# EAGLE board pertamina_sticker2 (EAGLE 7.6.0)
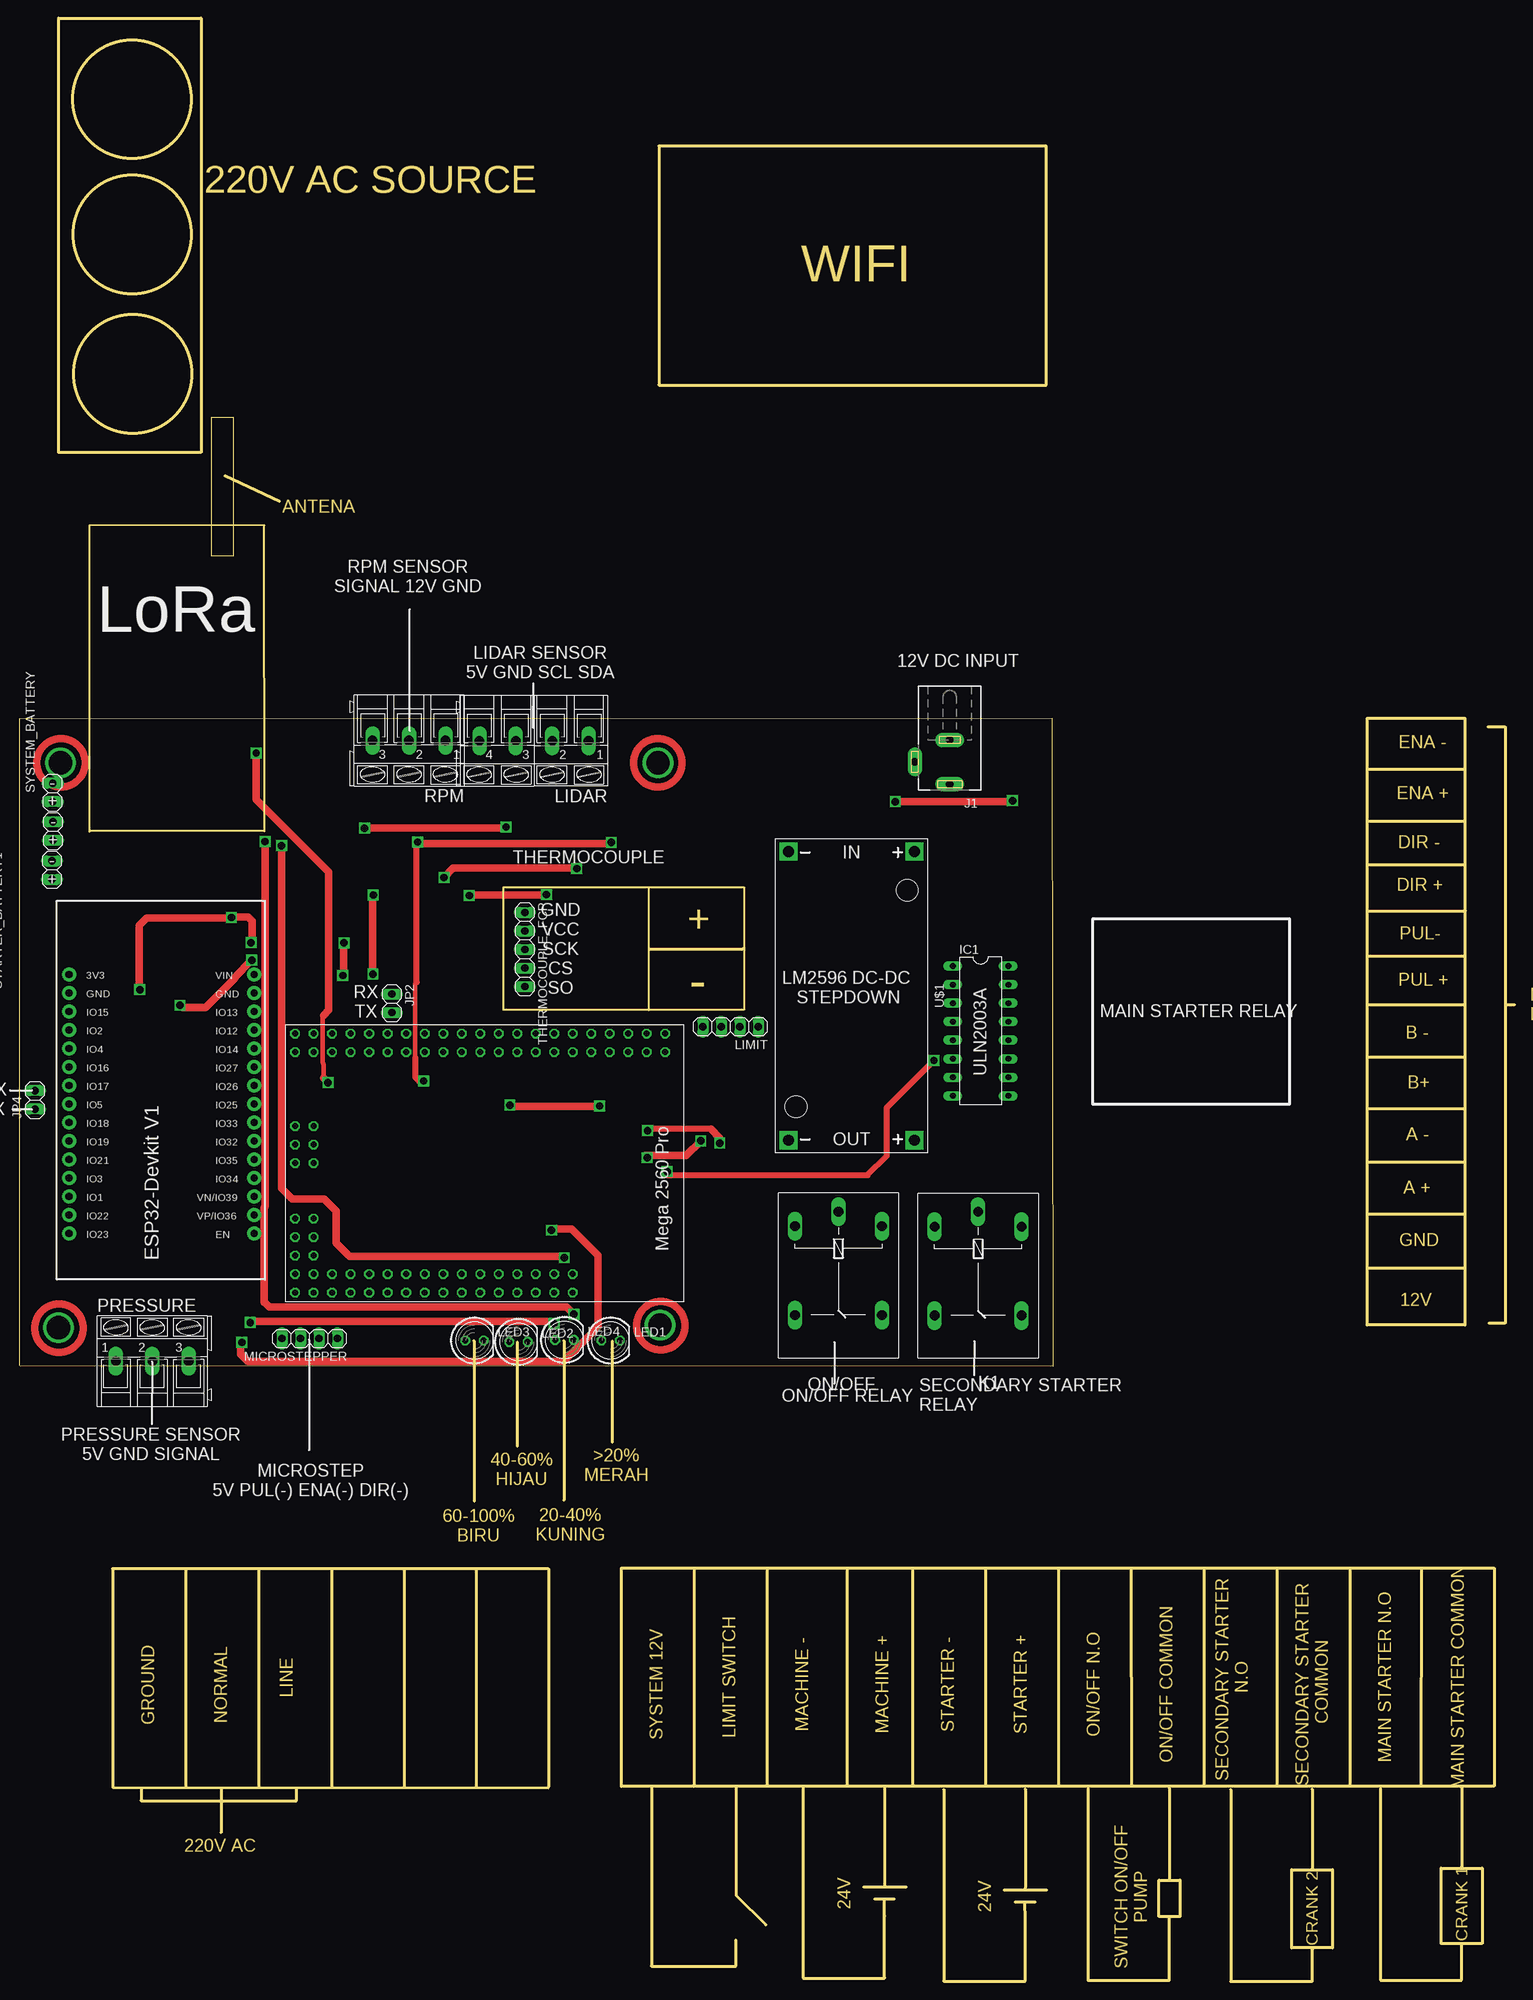
[diagram p0: board, top side]
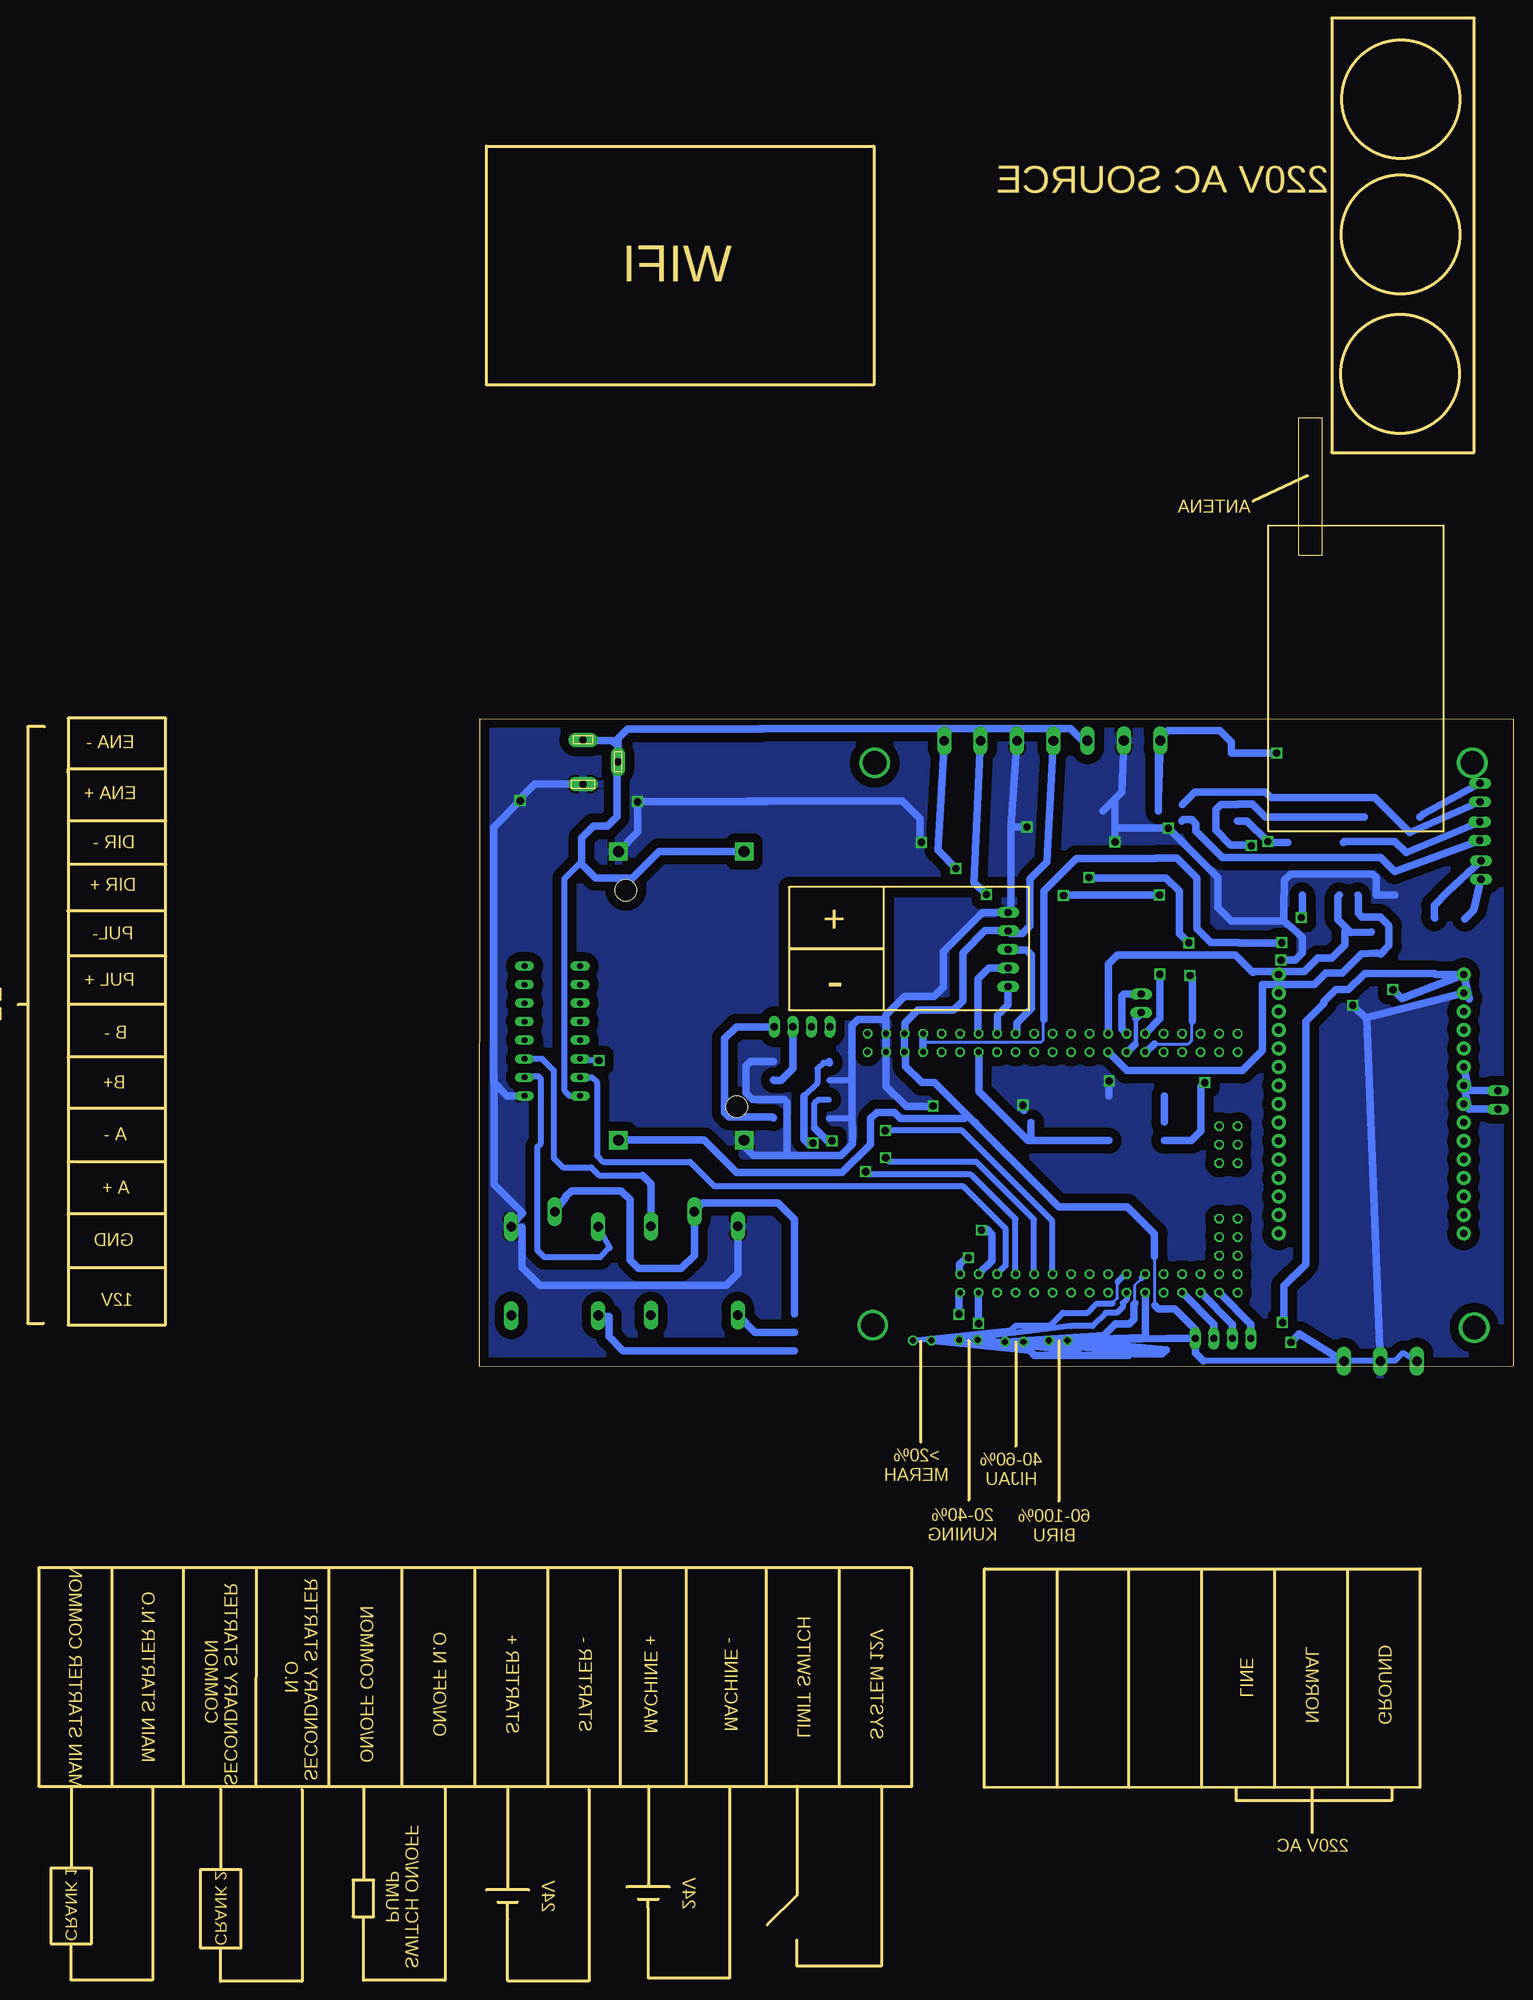
[diagram p1: board, bottom side, seen from below]

Size 205.23 x 269.44 mm. Coordinates in mm from the lower left corner, seen from the top.
Outline: 141.89,84.38 141.8,173.34 0,173.25 0,84.56
Outline: 86.39,133.3 86.39,150.18 99.43,150.18 99.43,133.33 86.37,133.33
Outline: 9.58,157.84 33.63,157.84 33.61,199.83 9.59,199.82 9.59,157.75
Outline: 9.6,183.58 9.6,172.64
Outline: 141.89,84.37 0.06,84.49
Outline: 82.59,56.72 202.42,56.72 202.42,26.78 82.58,26.76
Outline: 192.41,56.66 192.39,26.76
Outline: 182.59,56.65 182.59,26.84
Outline: 172.59,56.65 172.61,26.81
Outline: 162.59,56.65 162.59,26.84
Outline: 152.59,56.65 152.59,26.82
Outline: 142.59,56.65 142.58,26.87
Outline: 132.59,56.65 132.59,26.78
Outline: 122.59,56.65 122.58,26.78
Outline: 113.59,56.65 113.59,26.81
Outline: 102.59,56.65 102.6,26.8
Outline: 92.59,56.65 92.59,26.76
Outline: 82.59,56.65 82.6,26.73
Outline: 81.35,87.88 81.36,73.99
Outline: 74.73,87.91 74.73,66.04
Outline: 68.31,87.71 68.31,73.46
Outline: 62.38,87.9 62.41,65.9
Outline: 86.49,141.72 99.27,141.72
Outline: 72.65,56.55 72.65,26.71
Outline: 62.67,56.55 62.67,26.69
Outline: 52.82,56.53 52.82,26.57
Outline: 42.82,56.54 42.82,26.57
Outline: 32.82,56.54 32.82,26.62
Outline: 22.82,56.55 22.82,26.64
Outline: 12.82,56.57 12.82,26.57
Outline: 72.54,56.61 12.76,56.63
Outline: 12.81,26.61 72.6,26.58
Outline: 28.23,206.63 35.71,203.14
Outline: 86.74,26.81 86.74,2.08 98.35,2.08 98.35,5.67
Outline: 98.36,26.78 98.36,11.78 102.44,7.74
Outline: 107.57,26.74 107.57,0.42 118.74,0.42
Outline: 118.74,26.8 118.74,13.21
Outline: 118.74,0.49 118.74,8.97
Outline: 115.88,12.96 121.72,12.96
Outline: 120.1,11.27 117.38,11.27
Outline: 118.74,8.95 118.74,11.16
Outline: 126.87,26.33 126.87,0.02 138.05,0.02
Outline: 138.05,26.4 138.05,12.81
Outline: 138.05,0.09 138.05,8.57
Outline: 135.15,12.55 140.98,12.55
Outline: 139.41,10.87 136.69,10.87
Outline: 138.05,8.56 138.05,10.77
Outline: 146.66,26.45 146.66,0.14 157.84,0.14
Outline: 157.84,26.52 157.84,13.96
Outline: 157.84,0.21 157.84,8.69
Outline: 159.28,13.87 159.28,8.86 156.42,8.86 156.42,13.87 159.28,13.87
Outline: 166.28,26.31 166.28,0 177.45,0
Outline: 177.45,26.38 177.45,15.5
Outline: 177.45,0.07 177.46,4.39
Outline: 186.8,26.49 186.8,0.17 197.97,0.17
Outline: 180.22,15.31 180.24,4.57 174.63,4.57 174.62,15.33 180.22,15.32
Outline: 197.97,26.61 197.97,15.73
Outline: 197.97,0.3 197.97,4.91
Outline: 200.76,15.52 200.76,5.17 195.15,5.17 195.15,15.53 200.76,15.53
Outline: 16.7,26.48 16.7,24.79 38.04,24.79 38.04,26.52
Outline: 27.66,26.49 27.66,20.41
Outline: 87.78,251.89 87.78,219.09 140.94,219.09 140.94,251.9 87.78,251.89
Outline: 5.34,269.44 24.93,269.44 24.93,209.84 5.37,209.84 5.37,269.25
Outline: 184.98,173.37 198.39,173.37 198.39,90.09 184.98,90.09 184.98,173.37
Outline: 185.03,166.41 198.4,166.41 198.4,165.78
Outline: 184.98,159.26 198.35,159.26
Outline: 184.98,153.29 198.35,153.29
Outline: 185.1,146.91 198.47,146.91
Outline: 184.98,140.71 198.35,140.71
Outline: 184.99,134.05 198.36,134.05
Outline: 185.08,126.85 198.41,126.85
Outline: 185.07,119.82 198.35,119.8
Outline: 185.01,112.42 198.38,112.42
Outline: 185.01,105.3 198.37,105.3
Outline: 184.99,97.89 198.36,97.89
Outline: 201.6,172.19 203.94,172.19 203.94,90.31 201.74,90.31
Outline: 204,134.07 205.23,134.07
Outline: 99.43,150.19 99.43,133.34 66.44,133.34 66.44,150.19 99.43,150.19
Outline: 118.74,13.08 118.74,13.02 118.74,13 118.75,13.07 118.74,13.08
Outline: 138.04,12.68 138.04,12.61 138.05,12.6 138.06,12.67 138.04,12.68
Outline: circle at 15.44,258.31 radius 8.11
Outline: circle at 15.48,239.75 radius 8.11
Outline: circle at 15.56,220.62 radius 8.11
Copper layers (1*16): Top 0.035mm / dielectric 1.5mm / Bottom 0.035mm
Design rules "default": minimum track width 10mil, minimum drill 24mil, track to track 8mil, track to pad 8mil, pad to pad 8mil, via to via 8mil, smd to smd 8mil, copper to edge 40mil, drill to drill 8mil, minimum pad ring 10mil, minimum via ring 8mil, stop-mask expansion 4mil, vias tented up to drill 0mil, thermal gap 10mil

## Footprints (pad centres in the part's own frame; a part is rotated, then mirrored left to right if it is on the bottom)
DIL16 = drill 0.813 long: 1 -8.89,-3.81; 2 -6.35,-3.81; 3 -3.81,-3.81; 4 -1.27,-3.81; 5 1.27,-3.81; 6 3.81,-3.81; 7 6.35,-3.81; 8 8.89,-3.81; 9 8.89,3.81; 10 6.35,3.81; 11 3.81,3.81; 12 1.27,3.81; 13 -1.27,3.81; 14 -3.81,3.81; 15 -6.35,3.81; 16 -8.89,3.81
DCJ0202 = drill 1 pad 2 long: 1 0,3.1; 2 4.8,0; 3 0,-3
1X02 = drill 1.016 long: 1 -1.27,0; 2 1.27,0
G5LE = drill 1.321 long: 1 -7.493,-5.969; 2 -7.493,5.969; O 4.699,5.969; P -9.525,0; S 4.699,-5.969
LED5MM = drill 0.813 octagon: A -1.27,0; K 1.27,0
AK300/4 = drill 1.321 long: 1 -7.493,0; 2 -2.515,0; 3 2.515,0; 4 7.493,0
1X04 = drill 1.016 long: 1 -3.81,0; 2 -1.27,0; 3 1.27,0; 4 3.81,0
AK300/3 = drill 1.321 long: 1 -5.004,0; 2 0,0; 3 5.004,0
1X05 = drill 1.016 long: 1 -5.08,0; 2 -2.54,0; 3 0,0; 4 2.54,0; 5 5.08,0
DC-DC-STEP-DOWN-LM2596 = drill 1.5 pad 2.5 square: IN+ -19.812,8.636; IN- -19.812,-8.636; OUT+ 19.812,8.636; OUT- 19.812,-8.636 | hole 3: -14.478,7.62; 15.24,-7.62
ESP32-DEVKITV1 = drill 1 pad 1.93: 3V3 -16.52,-12.27; D1 13.96,-12.27; D2 -8.9,-12.27; D3 11.42,-12.27; D4 -6.36,-12.27; D5 1.26,-12.27; D12 -8.9,13.135; D13 -11.44,13.135; D14 -6.36,13.135; D15 -11.44,-12.27; D16 -3.82,-12.27; D17 -1.28,-12.27; D18 3.8,-12.27; D19 6.34,-12.27; D21 8.88,-12.27; D22 16.5,-12.27; D23 19.04,-12.27; D25 1.26,13.135; D26 -1.28,13.135; D27 -3.82,13.135; D32 6.34,13.135; D33 3.8,13.135; D34 11.42,13.135; D35 8.88,13.135; D36 16.5,13.135; D39 13.96,13.135; EN 19.04,13.135; GND@1 -13.98,13.135; GND@2 -13.98,-12.27; VIN -16.52,13.135
MEGAPROMINI = drill 0.8 octagon: P$1 3.81,-2.54; P$2 1.27,-2.54; P$3 3.81,-5.08; P$4 1.27,-5.08; P$5 3.81,-7.62; P$6 1.27,-7.62; P$7 3.81,-10.16; P$8 1.27,-10.16; P$9 3.81,-12.7; P$10 1.27,-12.7; P$11 3.81,-15.24; P$12 1.27,-15.24; P$13 3.81,-17.78; P$14 1.27,-17.78; P$15 3.81,-20.32; P$16 1.27,-20.32; P$17 3.81,-22.86; P$18 1.27,-22.86; P$19 3.81,-25.4; P$20 1.27,-25.4; P$21 3.81,-27.94; P$22 1.27,-27.94; P$23 3.81,-30.48; P$24 1.27,-30.48; P$25 3.81,-33.02; P$26 1.27,-33.02; P$27 3.81,-35.56; P$28 1.27,-35.56; P$29 3.81,-38.1; P$30 1.27,-38.1; P$31 3.81,-40.64; P$32 1.27,-40.64; P$33 3.81,-43.18; P$34 1.27,-43.18; P$35 3.81,-45.72; P$36 1.27,-45.72; P$37 3.81,-48.26; P$38 1.27,-48.26; P$39 3.81,-50.8; P$40 1.27,-50.8; P$41 3.81,-53.34; P$42 1.27,-53.34; P$43 36.83,-15.24; P$44 34.29,-15.24; P$45 36.83,-17.78; P$46 34.29,-17.78; P$47 36.83,-20.32; P$48 34.29,-20.32; P$49 36.83,-22.86; P$50 34.29,-22.86; P$51 36.83,-25.4; P$52 34.29,-25.4; P$53 36.83,-27.94; P$54 34.29,-27.94; P$55 36.83,-30.48; P$56 34.29,-30.48; P$57 36.83,-33.02; P$58 34.29,-33.02; P$59 36.83,-35.56; P$60 34.29,-35.56; P$61 36.83,-38.1; P$62 34.29,-38.1; P$63 36.83,-40.64; P$64 34.29,-40.64; P$65 36.83,-43.18; P$66 34.29,-43.18; P$67 36.83,-45.72; P$68 34.29,-45.72; P$69 36.83,-48.26; P$70 34.29,-48.26; P$71 36.83,-50.8; P$72 34.29,-50.8; P$73 36.83,-53.34; P$74 34.29,-53.34; P$75 31.75,-53.34; P$76 31.75,-50.8; P$77 29.21,-53.34; P$78 29.21,-50.8; P$79 26.67,-53.34; P$80 26.67,-50.8; P$81 19.05,-53.34; P$82 19.05,-50.8; P$83 16.51,-53.34; P$84 16.51,-50.8; P$85 13.97,-53.34; P$86 13.97,-50.8

## Placement (x,y rotation side)
IC1  ULN2003AN  [DIL16]  131.92,130.43 270 top
J1  DCJ0202  [DCJ0202]  127.69,167.39 180 top
JP2  [1X02]  51.1,134.23 270 top
JP4  [1X02]  2.12,120.98 90 top
K1  G5L  [G5LE]  131.59,96.08 270 top
LED1  [LED5MM]  81.16,87.94 0 top
LED2  [LED5MM]  68.49,87.76 0 top
LED3  [LED5MM]  62.45,87.94 0 top
LED4  [LED5MM]  74.8,88.03 0 top
LIDAR  [AK300/4]  70.62,170.27 180 top
LIMIT  [1X04]  97.61,131.01 180 top
MACHINE_BATTERY_12V  [1X02]  4.61,157.85 90 top
MICROSTEPPER  [1X04]  39.84,88.23 180 top
ON/OFF  G5L  [G5LE]  112.42,96.13 270 top
PRESSURE  [AK300/3]  18.23,85.09 0 top
RPM  [AK300/3]  53.46,170.29 180 top
STARTER_BATTERY1  [1X02]  4.45,152.51 270 top
SYSTEM_BATTERY  [1X02]  4.56,163.17 90 top
THERMOCOUPLE_FCP  [1X05]  69.37,141.61 270 top
U$1  DC-DC-STEP-DOWN-LM2596  [DC-DC-STEP-DOWN-LM2596]  114.21,135.26 270 top
U$2  [ESP32-DEVKITV1]  19.08,121.67 270 top
U$3  [MEGAPROMINI]  91.18,131.35 270 top

## Library data of the parts
IC1 = uln-udn
J1 = con-jack; OC_FARNELL: unknown; OC_NEWARK: unknown
JP2 JP4 LIMIT MACHINE_BATTERY_12V MICROSTEPPER STARTER_BATTERY1 SYSTEM_BATTERY THERMOCOUPLE_FCP = pinhead
K1 ON/OFF = relay; OC_FARNELL: unknown; OC_NEWARK: unknown
LED1-LED4 = led
LIDAR PRESSURE RPM = con-ptr500; OC_FARNELL: unknown; OC_NEWARK: unknown
U$1 = diy-modules
U$2 = ESP32-DEVKITV1
U$3 = MEGAPROMINI

## Nets
3.3V: U$2.3V3 U$3.P$7 U$3.P$8
5V: U$3.P$44
5V1: U$3.P$45
5V_ARDU: LED1.A LED2.A LED3.A LED4.A LIDAR.4 MICROSTEPPER.1 PRESSURE.1 THERMOCOUPLE_FCP.2 U$1.OUT+ U$3.P$5 U$3.P$6
GND: IC1.9 J1.1 K1.2 LIDAR.3 ON/OFF.1 PRESSURE.2 RPM.2 THERMOCOUPLE_FCP.1 U$1.IN+ U$1.OUT- U$2.GND@2 U$3.P$3 U$3.P$4
N$1: JP2.1 U$3.P$30
N$2: JP2.2 U$3.P$29
N$3: U$3.P$43
N$4: IC1.10 K1.1
N$5: THERMOCOUPLE_FCP.5 U$3.P$16
N$6: THERMOCOUPLE_FCP.4 U$3.P$14
N$8: THERMOCOUPLE_FCP.3 U$3.P$18
N$9: U$3.P$28
N$10: SYSTEM_BATTERY.2
N$12: U$3.P$27
N$13: MACHINE_BATTERY_12V.2
N$14: IC1.8 J1.2 J1.3 RPM.1 U$1.IN-
N$16: U$3.P$13
N$17: RPM.3
N$18: JP4.1 U$2.D17
N$19: JP4.2 U$2.D16
N$21: IC1.7 U$3.P$48
N$29: STARTER_BATTERY1.2
N$30: STARTER_BATTERY1.1
N$31: MACHINE_BATTERY_12V.1
N$32: SYSTEM_BATTERY.1
N$33: IC1.6 U$3.P$50
N$34: MICROSTEPPER.4 U$3.P$71
N$37: MICROSTEPPER.2 U$3.P$67
N$38: MICROSTEPPER.3 U$3.P$69
N$41: PRESSURE.3 U$3.P$46
N$42: U$3.P$52
N$43: U$3.P$54
N$44: IC1.11 ON/OFF.2
N$45: LED2.K U$3.P$64
N$46: LED3.K U$3.P$63
N$47: LED1.K U$3.P$62
N$48: LED4.K U$3.P$61
N$49: LIMIT.1
N$50: LIMIT.2
N$53: K1.P ON/OFF.P
N$54: ON/OFF.S
N$55: K1.S
SCL: LIDAR.2 U$3.P$32
SDA: LIDAR.1 U$3.P$31

## Tracks (layer width: path | path; a pad name or v marks a point on that pad's centre or on a via)
3.3V  (via drill 1)
  Top 1.016: v31.79,142.55 31.9,142.55 31.95,142.49 31.95,145.52 31.41,146.06 29.15,146.06 v29.09,146 29.01,145.91 17.46,145.91 16.42,144.87 16.42,136.16 16.47,136.1 v16.53,136.1
  Bottom 0.406: U$3.P$8 81.02,128.63 80.81,128.43 80.81,128.48 81.02,128.68 81.02,128.95 64.77,128.95 64.53,129.19 64.53,131.47 64.4,131.6 64.4,131.97 64.44,132.01
  Bottom 1.016: U$3.P$7 U$3.P$8 | 64.44,132.01 64.44,149.63 59.96,154.11 49.12,154.11 49.07,154.16 46.18,154.16 43.44,151.43 43.44,144.49 41.5,142.55 37.83,142.55 37.78,142.49 31.84,142.49 v31.79,142.55 | 29.09,146.06 v29.09,146 28.98,146.12 28.98,149.06 | 6.04,134.84 U$2.3V3 15.34,134.92 v16.53,136.1
5V  (via drill 1)
  Top 1.016: v35.97,155.86 35.97,108.85 37.42,107.4 41.8,107.4 43.5,105.71 43.5,101.31 45.29,99.52 74.59,99.52 v74.79,99.32
  Bottom 1.016: v35.97,155.86 36.05,155.94 38.82,155.94 40.86,157.99 40.86,160.8 40.12,161.54 37.79,161.54 37.78,161.55 35.81,161.55 34.04,159.78 20.44,159.78 | v74.79,99.32 74.79,99.42 74.69,99.52 74.88,99.52 76,98.39 76,97.13 U$3.P$44
5V1  (via drill 1)
  Top 1.016: 73.58,90.28 v73.39,90.28 73.12,90.55 31.68,90.55 | v31.68,90.41 31.68,90.55 | 31.68,90.55 31.55,90.68
  Bottom 1.016: 6.67,138.18 10.66,138.18 10.79,138.31 20.41,138.31 22.62,136.1 24.39,136.1 26.01,134.49 26.01,134.22 28.51,131.71 28.51,98.42 31.48,95.45 31.48,90.62 v31.68,90.41 | U$3.P$45 v73.4,90.28 v73.39,90.28
5V_ARDU
  Bottom 0.406: 49.18,92.62 49.18,92.74 49.18,99.39 49.27,99.48
  Bottom 0.813: PRESSURE.1 15.14,86.21 16.21,85.15 42.54,85.15
  Bottom 1.016: U$3.P$6 U$3.P$5 83.41,127.4 83.41,125.57 81.19,123.35 79.43,123.35 74.95,118.86 | 83.51,130.13 U$3.P$6 | U$3.P$6 83.51,130.13 83.51,131.52 81.72,133.31 76.84,133.31 75.58,134.57 75.58,141.15 72.51,144.21 69.43,144.21 THERMOCOUPLE_FCP.2 69.01,143.8 67.39,143.8 66.36,144.83 66.36,151.27 64.01,153.62 LIDAR.4 | 49.27,99.48 49.27,102.58 53,106.31 62.39,106.31 73.96,117.88 | 73.96,117.88 74.95,118.86 | MICROSTEPPER.1 43.65,86.26 42.54,85.15 | MICROSTEPPER.1 43.65,89.49 46.44,92.28 48.72,92.28 49.18,92.74 | MICROSTEPPER.1 47.46,88.23 LED3.A 47.66,86.67 48.24,86.09 51.92,86.09 52.27,86.43 | 52.27,86.43 LED2.A | LED1.A 66.36,86.57 65.72,85.92 59.42,85.92 | 59.42,85.92 52.77,85.92 52.27,86.43 | LED4.A 60,86.5 59.42,85.92 | U$1.OUT+ 111.1,115.44 106.64,110.99 92.13,110.99 88.24,114.89 88.24,118.39 87.36,119.27 84.95,119.27 84.13,118.45 75.36,118.45 74.95,118.86 | 73.82,117.88 73.96,117.88
GND  (via drill 1)
  Top 0.61: 54.32,126.75 54.32,136.92 54.54,137.13
  Top 0.813: v55.48,123.56 54.86,123.56 54.32,124.09 54.32,126.75 | 54.54,137.13 54.54,155.84 54.54,156.25 v54.67,156.38
  Top 1.016: 47.2,158.27 v47.35,158.27 66.63,158.27 v66.78,158.42 | v22.03,133.96 22.08,133.96 22.41,133.63 25.53,133.63 29.54,137.64 29.54,137.8 v31.89,140.16 | v79.64,120.15 79.75,120.15 79.86,120.04 67.53,120.04 v67.31,120.26 | v54.67,156.38 54.67,156.45 54.66,156.45 | v81.24,156.31 81.24,156.16 54.85,156.16 54.54,155.84 | v136.31,162.03 136.18,161.9 v120.21,161.9
  Bottom 0.813: 93.93,123.7 90.82,123.7 90.75,123.76 | 93.97,118.47 91.03,118.47 90.75,118.19
  Bottom 1.016: 16.28,149.06 18.82,149.06 18.82,151.48 19.33,151.99 30.55,151.99 31.41,151.13 31.41,149.16 31.52,149.06 31.52,145.53 | U$3.P$4 U$3.P$3 86.1,122.81 83.32,120.04 79.86,120.04 | 86.2,130.19 U$3.P$4 | U$3.P$4 86.12,130.1 86.12,131.94 | LIDAR.3 68.98,158.42 | 68.98,158.42 68.98,147.07 THERMOCOUPLE_FCP.1 72.88,146.69 78.21,141.36 78.21,136.48 79.53,135.17 83.59,135.17 86.12,132.65 86.12,131.94 | 31.52,145.53 29.69,143.99 28.95,143.25 28.95,141.1 29.9,140.16 v31.89,140.16 32,140.16 | 31.52,145.53 38.74,145.53 40.59,147.38 40.59,151.51 v47.35,158.27 54.59,158.27 54.67,158.19 | v66.78,158.42 68.98,158.42 | PRESSURE.2 20.14,132.08 | 20.14,132.08 v22.03,133.96 | 86.12,131.94 86.17,131.99 89.97,131.99 90.75,131.2 90.75,127.33 | U$2.GND@2 19.84,132.38 20.14,132.08 | 79.72,120.23 v79.64,120.15 | v67.31,120.26 67.31,120.2 67.2,120.09 67.2,119.49 | 90.75,122.29 90.75,118.19 90.75,117.42 90.74,117.4 90.74,114.89 92.28,113.35 100.02,113.35 | 90.75,122.29 90.75,123.76 90.75,127.33 | 90.77,122.27 90.75,122.29 | 90.88,127.45 90.75,127.33 | U$1.OUT- 105.58,114.64 104.29,113.35 100.02,113.35 | 54.63,156.41 v54.67,156.38 54.67,158.19 | 55.44,123.42 55.48,123.47 v55.48,123.56 55.48,121.52 55.5,121.52 | v81.24,156.31 81.47,156.55 81.47,159.6 83.85,161.97 105.15,161.97 105.22,161.9 | RPM.2 53.71,163.23 54.67,162.27 | 54.67,162.27 56.33,160.61 | 54.67,158.19 54.67,162.27 | 102.44,161.9 105.22,161.9 | 105.22,161.9 v120.21,161.9 120.21,157.71 U$1.IN+ | v136.31,162.03 136.45,162.17 134.32,164.29 J1.1 | 136.45,161.9 v136.31,162.03 | IC1.9 138.13,121.54 139.99,123.41 139.99,124.54 | 139.99,124.54 139.99,158.36 v136.31,162.03
  Bottom 1.016: 139.99,124.54 139.88,124.43 139.88,109.35 135.97,105.44 K1.2 136.06,103.48 136.06,97.97 133.63,95.54 108.05,95.54 106.45,97.13 ON/OFF.1 | 101.55,126.24 101.56,126.25 104.7,126.25 105.34,125.61 105.34,121.95 104.4,121.01 100.06,121.01 99.68,120.63 99.68,113.7 100.02,113.35
  pour Bottom (isolate 1.27): -0.97,173.59 143.42,173.59 144.08,83.29 -0.51,83.29 -0.51,162.13
N$1
  Bottom 1.016: JP2.1 53.48,135.5 53.72,135.26 53.72,130.73 U$3.P$30
N$2
  Bottom 0.61: 51.93,128.56 51.78,128.72 51.78,132.12
  Bottom 1.016: U$3.P$29 52.95,127.54 51.93,128.56 | 51.78,132.12 51.1,132.8 JP2.2
N$3  (via drill 1)
  Top 1.016: v33.71,156.42 33.71,106.35 33.6,106.24 33.6,93.19 33.65,93.19 34.28,92.56 75.1,92.56 v76.11,91.55 75.88,91.79
  Bottom 1.016: 37.85,159.28 36.57,159.28 v33.71,156.42 33.58,156.29 30.94,156.29 | 76.03,94.43 U$3.P$43 76.11,94.35 v76.11,91.55
N$4
  Bottom 0.813: K1.1 124.03,100.71 125.35,99.38 133.01,99.38 133.96,100.33 133.96,114.54 133.48,115.02 133.48,123.87 133.83,124.21 135.61,124.21 IC1.10
N$5
  Bottom 1.016: THERMOCOUPLE_FCP.5 69.37,134.02 70.81,132.57 70.81,130.13 U$3.P$16
N$6
  Bottom 1.016: THERMOCOUPLE_FCP.4 71.99,139.07 73.47,137.6 73.47,130.15 U$3.P$14
N$8
  Bottom 1.016: THERMOCOUPLE_FCP.3 69.32,141.61 69.22,141.51 66.85,141.51 66.17,140.84 66.17,133.49 68.15,131.51 68.15,130.25 U$3.P$18
N$9
  Bottom 1.016: 19.53,143.99 22.31,143.96 22.78,144.44 | 22.78,144.44 24.08,145.74 24.08,148.87 23.9,149.06 | 22.78,144.44 23.16,144.06 23.16,142.22 24.94,140.44 26.83,140.44 28.7,138.57 35.69,138.57 35.78,138.48 38.19,140.88 54.35,140.88 55.62,139.62 U$3.P$28
N$10
  Bottom 1.016: SYSTEM_BATTERY.2 12.38,160.21 12.82,159.78
N$12
  Bottom 1.016: 21.36,149.06 21.3,149 21.3,146.61 20.77,146.08 18.28,146.08 17.09,144.89 17.09,142.15 18.22,141.02 18.79,141.1 20.85,141.02 23.48,138.39 25.74,138.39 27.34,136.79 34.49,136.79 34.49,127.74 37.23,125 53.07,125 U$3.P$27
N$13
  Bottom 1.016: MACHINE_BATTERY_12V.2 14.73,154.89 16.25,156.42 23.19,156.42 23.32,156.29
N$14
  Bottom 0.813: IC1.8 129.56,121.54 130.23,122.21 130.23,151.39 127.9,153.71
  Bottom 1.016: RPM.1 58.72,169.9 60.78,171.97 102.85,171.97 | 102.85,171.97 103.4,171.97 | J1.2 122.89,169.52 123.69,170.32 127.62,170.32 J1.3 | J1.2 122.89,170.6 121.59,171.9 102.92,171.9 102.85,171.97 | U$1.IN- 117.25,155.07 120.87,151.45 125.99,151.45 127.9,153.35 127.9,153.71 127.9,156.91 126.26,158.55 124.35,158.55 123.04,159.87 123.04,167.25 J1.2
N$15
  Bottom 1.016: 47.88,121.52 47.88,117.97 47.93,117.93
N$16
  Bottom 1.016: U$3.P$13 73.34,127.49 73.34,122.11 66.61,115.39 66.41,115.39 | 55.55,115.39 66.41,115.39 | 66.2,117.88 66.2,115.6 66.41,115.39
N$17  (via drill 1)
  Top 0.61: 41.74,123.95 41.74,125.93 41.64,126.04 41.64,132.48 41.74,132.59
  Top 1.016: 42.46,123.35 v42.35,123.35 41.74,123.95 | v32.48,168.59 32.49,165.62 32.49,162.21 42.46,152.24 42.46,133.31 41.74,132.59
  Bottom 1.016: v42.35,123.35 42.91,122.79 42.86,122.74 42.86,116.69 44.17,115.39 47.93,115.39 | v32.48,168.59 38.68,168.59 38.72,168.63 38.72,170.09 40.28,171.64 47.44,171.64 48.71,170.38 48.71,160.61 48.71,162.1 RPM.3
N$18
  Bottom 1.016: JP4.1 6.09,119.71 U$2.D17
N$19
  Bottom 1.016: JP4.2 6.09,122.25 U$2.D16
N$21
  Bottom 0.813: IC1.7 126.49,124.08 125.8,123.4 125.8,113.35 124.93,112.49 113.02,112.49 109.69,109.16 75.54,109.16 69.69,103.31 69.69,98.23 U$3.P$48
N$29
  Bottom 1.016: STARTER_BATTERY1.2 5.46,147.01 6.67,145.8
N$30
  Bottom 1.016: STARTER_BATTERY1.1 9,149.55 10.87,147.68 10.87,146.01 10.79,145.93
N$31
  Bottom 1.016: MACHINE_BATTERY_12V.1 16.29,152.35 18.2,154.26 39.93,154.26 43.55,157.88 43.55,158.85 44.14,159.44 45.3,159.44 45.47,159.28
N$32
  Bottom 1.016: SYSTEM_BATTERY.1 14.22,157.68 17.28,160.74 17.31,160.74 19.02,162.45 33.25,162.45 34.06,163.25 43.69,163.25 45.41,161.54
N$33  (via drill 1)
  Top 0.813: v88.91,111.13 88.91,111.06 88.52,110.67 116.43,110.67 119.04,113.28 119.04,119.91 v125.52,126.39
  Bottom 0.813: U$3.P$50 68.32,104.6 74.44,110.73 88.52,110.73 v88.91,111.13 | v125.52,126.39 127.88,126.39 IC1.6
N$34
  Bottom 1.016: 40.42,94.48 U$3.P$71 36.03,90.18 MICROSTEPPER.4
N$35  (via drill 3.2)
  other vias: 5.63,167.26
N$36  (via drill 3.2)
  other vias: 5.36,89.7
N$37
  Bottom 1.016: 45.5,94.48 U$3.P$67 41.11,90.18 MICROSTEPPER.2
N$38
  Bottom 1.016: 42.96,94.48 U$3.P$69 38.57,90.18 MICROSTEPPER.3
N$39  (via drill 3.2)
  other vias: 87.93,90.04
N$40  (via drill 3.2)
  other vias: 87.65,167.23
N$41  (via drill 1)
  Top 1.016: v30.52,87.69 30.43,87.69 30.38,87.74 30.38,86.05 31.34,85.09 74.67,85.09 79.41,89.83 79.41,99.62 75.78,103.25 73.17,103.25 v73.01,103.09
  Bottom 1.016: PRESSURE.3 29.39,88.83 v30.52,87.69 | v73.01,103.09 73.09,103.09 73.17,103.17 72.2,103.17 71.56,102.53 71.56,98.9 U$3.P$46
N$42  (via drill 1)
  Top 0.813: v86.17,113.03 86.17,113.06 85.88,113.35
  Top 1.016: 85.88,113.35 91.51,113.35 v93.52,115.36
  Bottom 0.813: U$3.P$52 65.78,104.54 73.71,112.47 85.61,112.47 v86.17,113.03 | 95.9,117.14 95.9,120.53 95.41,121.03 93.98,121.03 93.97,121.01
  Bottom 1.016: v93.52,115.36 94.12,115.36 95.9,117.14
N$43  (via drill 1)
  Top 0.813: 94.92,116.97 86.43,116.97 v86.21,116.75
  Top 1.016: v96.12,115.03 96.12,115.76 94.92,116.97
  Bottom 0.813: v86.21,116.75 86.37,116.75 86.45,116.83 75.75,116.83 63.33,104.42 63.33,97.16 U$3.P$54 | 93.85,126.06 94.72,126.06 95.52,125.26 95.52,123.32 97.35,121.48
  Bottom 1.016: 93.93,126.24 93.93,126.13 93.85,126.06 | 97.35,121.48 97.35,115.52 96.75,114.91 96.24,114.91 v96.12,115.03
N$44
  Bottom 0.813: IC1.11 133.31,126.61 131.74,125.04 131.74,112.99 130.45,111.71 126.58,111.71 125.48,110.61 119.55,110.61
  Bottom 1.016: ON/OFF.2 118.39,109.45 119.55,110.61
N$45
  Bottom 0.406: 51.92,93.04 51.92,95.59 51.02,96.5
  Bottom 0.813: 51.02,96.5 51.02,96.58 U$3.P$64
  Bottom 1.016: LED2.K 56.23,88.62 54.62,90.24 52.72,90.24 52.09,90.87 52.09,92.88 51.92,93.04
N$46
  Bottom 1.016: U$3.P$63 50.54,88.38 LED3.K
N$47
  Bottom 0.406: 55.03,93.08 54.32,93.79 54.32,95.96
  Bottom 0.813: LED1.K 68.9,89.42 68.31,90.01 63.57,90.01 61.83,91.75 58.49,91.75 57.23,93.01 55.1,93.01 55.03,93.08 | 54.32,95.96 53.22,97.06 U$3.P$62
N$48
  Bottom 0.813: LED4.K 60.73,89.94 57.77,89.94 55.96,91.75 54.4,91.75 53.62,92.53 53.62,93.07 53.08,93.61 U$3.P$61
N$49
  Bottom 1.016: LIMIT.1 106.63,131.01 108.27,129.37 108.27,119.21 107.66,118.6 101.72,118.6 101.59,118.47
N$50
  Bottom 1.016: LIMIT.2 98.88,125.29 100.51,123.66 101.51,123.66 101.55,123.7
N$53
  Bottom 1.016: K1.P 130,107.63 130.08,107.71 129.29,108.5 122.45,108.5 121.26,107.31 121.26,99.03 120.08,97.84 114.23,97.84 112.42,99.65 ON/OFF.P 111.27,106.8 100.97,106.8 98.7,104.53 98.7,91.62
N$54
  Bottom 1.016: 98.7,89.08 104.1,89.08 ON/OFF.S
N$55
  Bottom 1.016: 98.7,86.54 122.19,86.54 124.16,88.5 124.16,91.26 K1.S
SCL  (via drill 1)
  Top 1.016: v72.33,149.15 72.4,149.08 61.81,149.08 v61.75,149.02 | 48.51,138.1 v48.51,138.23 48.51,149.02 v48.57,149.08
  Bottom 1.016: LIDAR.2 74.01,150.83 v72.33,149.15 | 61.75,149.15 v61.75,149.02 61.68,149.08 v48.57,149.08 48.44,149.08 | U$3.P$32 50.54,130.12 48.54,132.11 48.54,138.2 v48.51,138.23
SDA  (via drill 1)
  Top 1.016: v76.5,152.74 76.55,152.74 76.61,152.79 59.55,152.79 v58.26,151.5 | v44.54,142.53 44.52,142.53 44.5,142.51 44.5,138.16 v44.38,138.04
  Bottom 0.406: 49.29,128.68 44.64,128.68 44.15,129.16 44.15,131.74 44.08,131.8
  Bottom 1.016: U$3.P$31 50.43,127.54 49.29,128.68 | 44.08,131.8 44.08,137.75 v44.38,138.04 | LIDAR.1 78.99,155.23 v76.5,152.74 | v58.26,151.5 58.21,151.45 47.67,151.45 45.84,149.62 45.84,143.83 v44.54,142.53
(copper drawn outside any net)
  shapes: Top circle x4

## Text on the board
Dimension: PERTAMINA SAFETEAM | 220V AC SOURCE | WIFI | ANTENA | ENA - | ENA + | DIR - | DIR + | + | PUL- | - | PUL + | MICROSTEP / DRIVER | B - | B+ | A - | A + | GND | 12V | 40-60% / HIJAU | >20% / MERAH | 60-100% / BIRU | 20-40% / KUNING | LINE | LIMIT SWITCH | SECONDARY STARTER / N.O | MAIN STARTER N.O | MAIN STARTER COMMON | GROUND | NORMAL | SYSTEM 12V | MACHINE - | MACHINE + | STARTER - | STARTER + | ON/OFF N.O | ON/OFF COMMON | SECONDARY STARTER / COMMON | 220V AC | 24V | 24V | SWITCH ON/OFF / PUMP | CRANK 2 | CRANK 1
tPlace: RPM SENSOR / SIGNAL 12V GND | LoRa | LIDAR SENSOR / 5V GND SCL SDA | 12V DC INPUT | - | + | - | + | - | THERMOCOUPLE | + | GND / VCC / SCK / CS / SO | LM2596 DC-DC / STEPDOWN | RX / TX | MAIN STARTER RELAY | ULN2003A | RX / TX | ON/OFF RELAY | SECONDARY STARTER / RELAY | PRESSURE SENSOR / 5V GND SIGNAL | MICROSTEP / 5V PUL(-) ENA(-) DIR(-)